# Altium PCB Karsyhev.PcbDoc
Units mm, origin at the board's own origin, x right, y up, seen from the top; angles counter-clockwise.
Board outline 32 x 34 mm, 2 copper layers (Top Layer, Bottom Layer); 35 components, 21 nets, 187 pads, 53 vias.
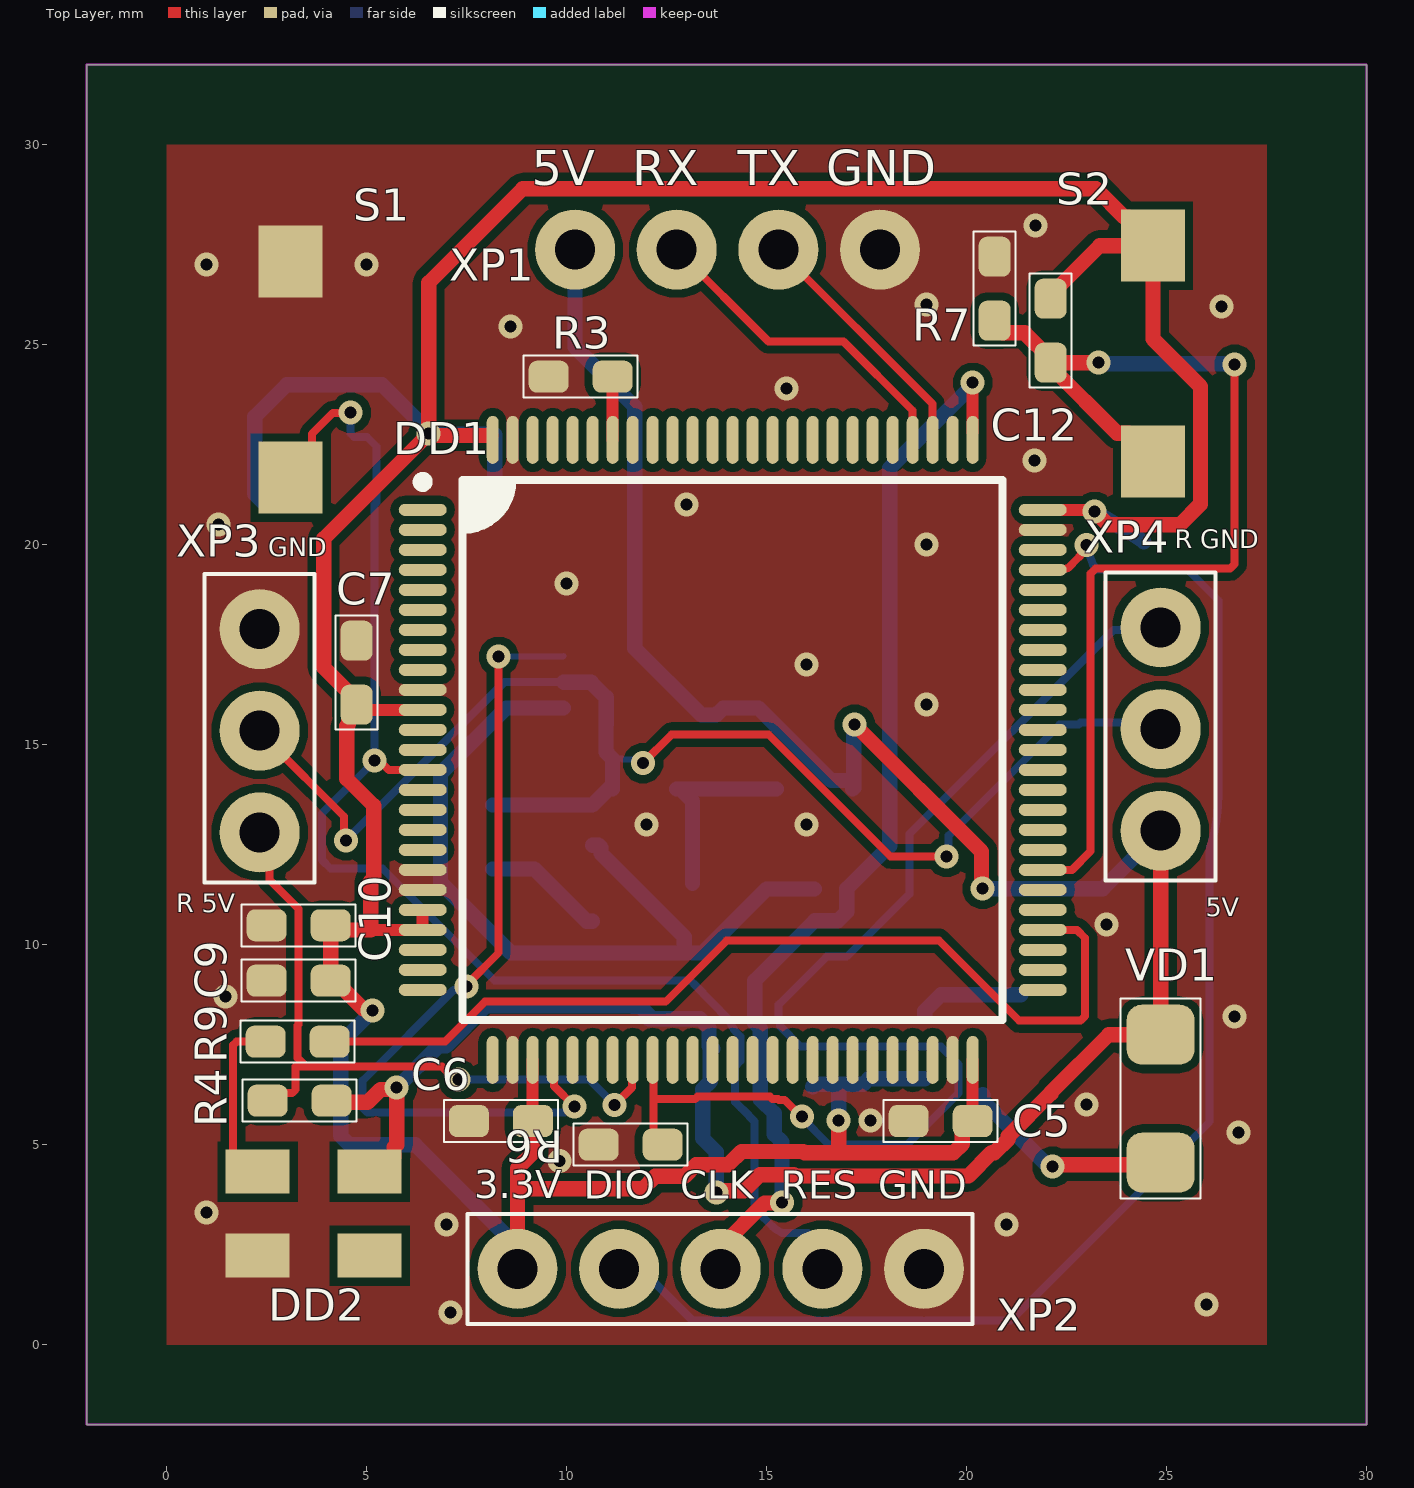
[diagram p0: Top Layer view]
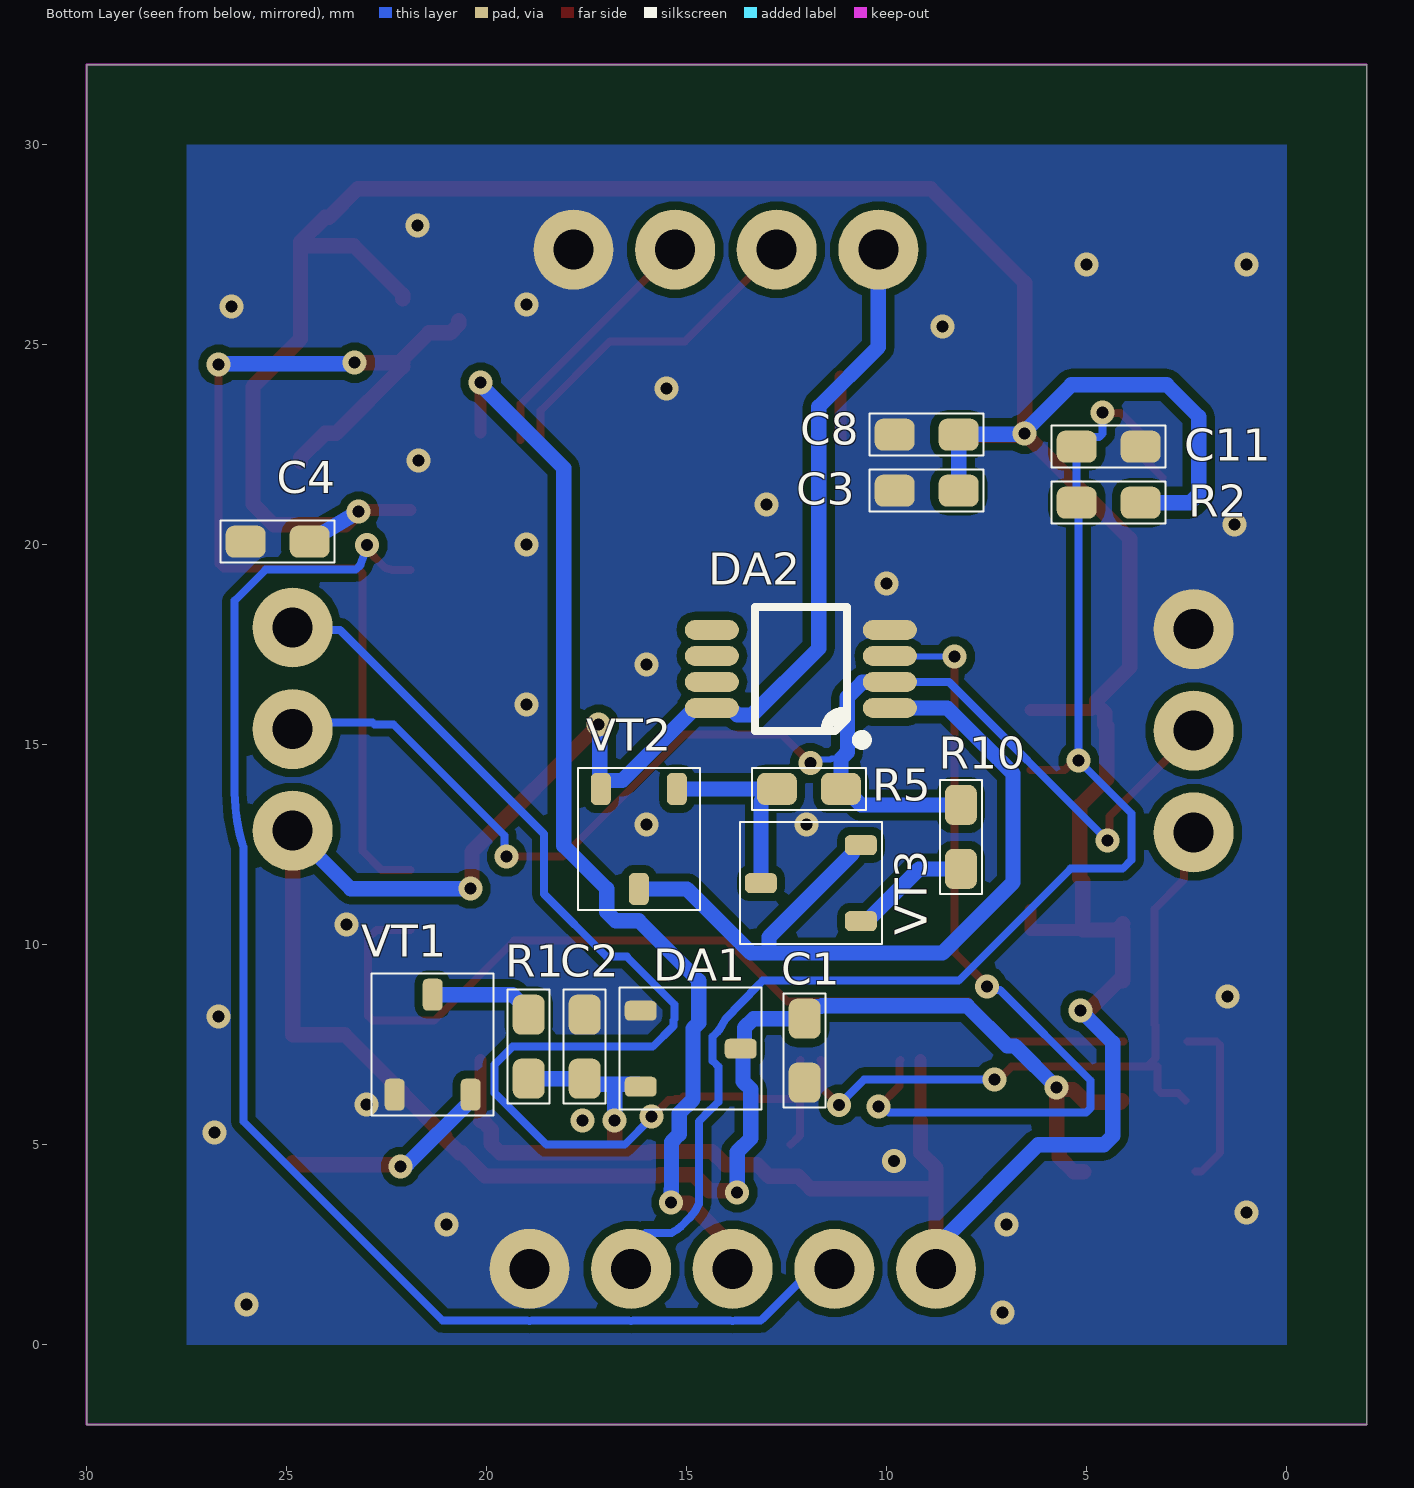
[diagram p1: Bottom Layer view, seen from below]
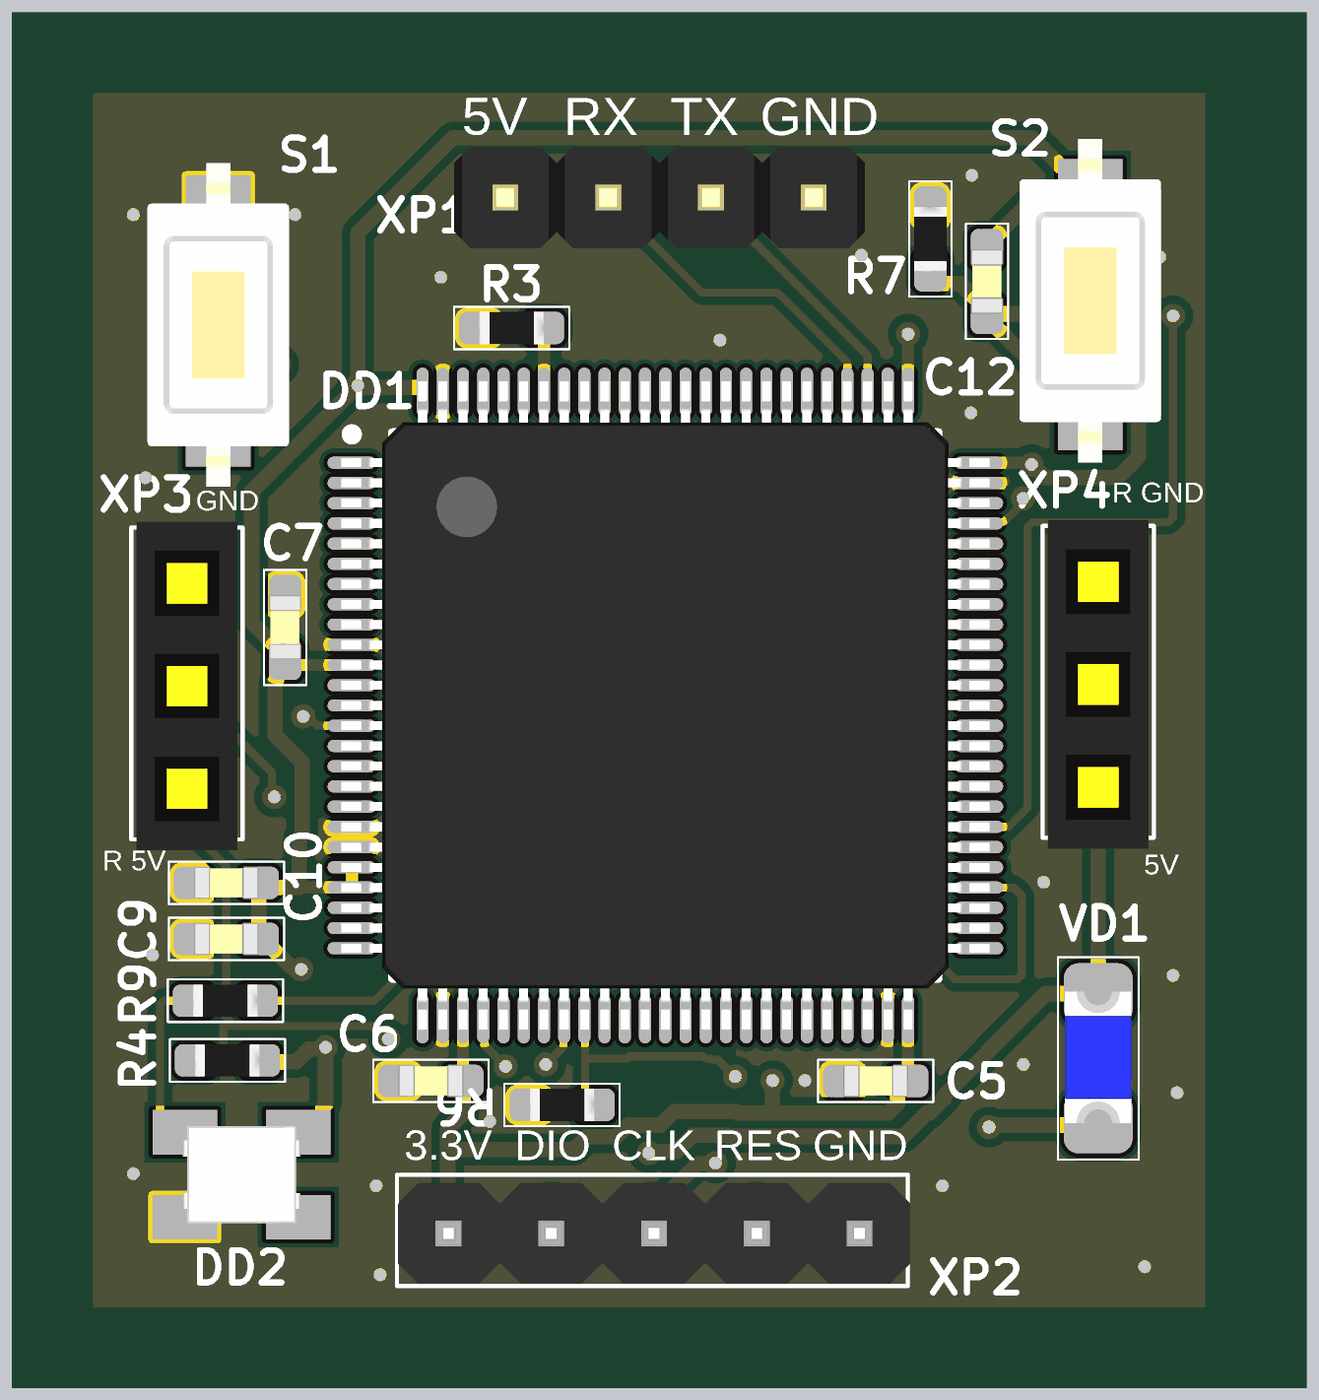
[diagram p2: 3D render of the assembled board from above, using the file's embedded part models]
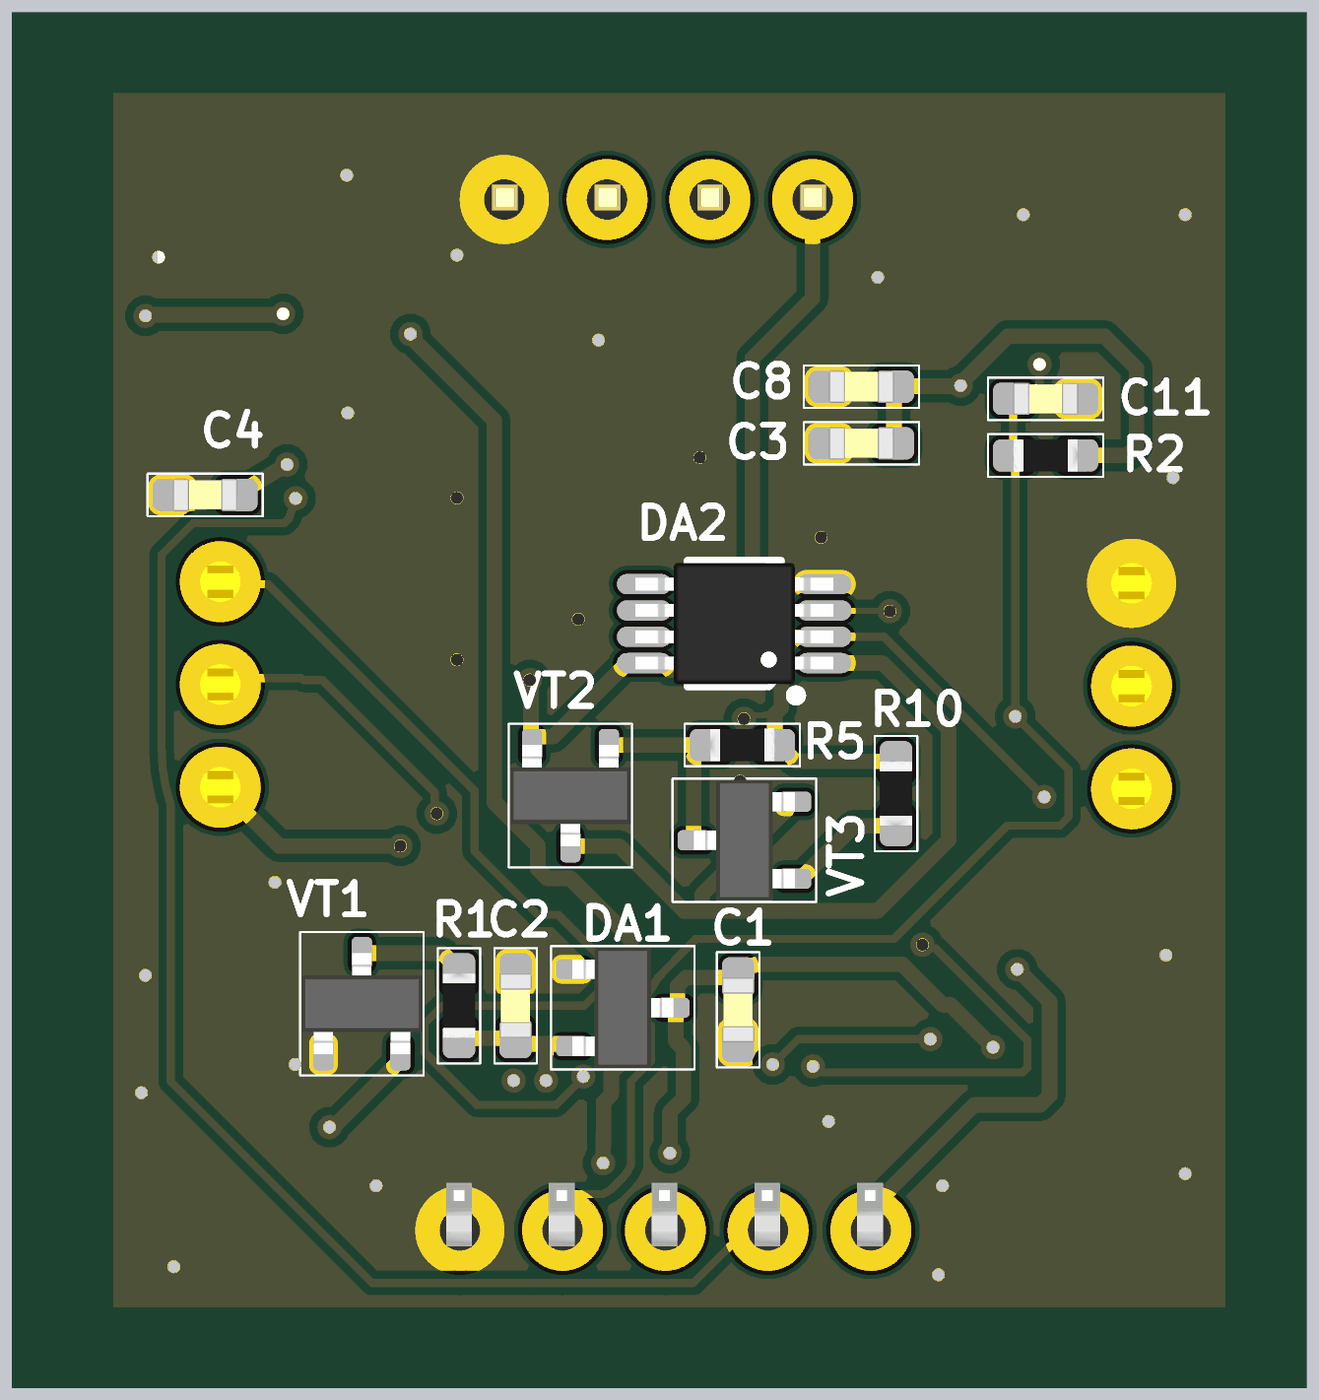
[diagram p3: 3D render of the assembled board from below, using the file's embedded part models]

## Layer stack, top to bottom
Top Solder: solder mask 0.0102, Solder Resist, Dk 3.5
Top Layer: signal copper 0.0356
Dielectric 1: dielectric 0.32, FR-4, Dk 4.8
Bottom Layer: signal copper 0.0356
Bottom Solder: solder mask 0.0102, Solder Resist, Dk 3.5

## Board outline
-2,-2 30,-2 30,32 -2,32

## Design rules (kind name [scope] priority, off if disabled: settings)
Clearance [All] p1: gap=0.2 ignorepadtopadclearanceinfootprint=TRUE
PlaneConnect [All] p1: planeconnectstyle=Direct reliefexpansion=0.508 reliefentries=4 reliefconductorwidth=0.254 reliefairgap=0.254
PolygonConnect [All] p1: connectstyle=Direct reliefconductorwidth=0.254 reliefentries=2 polygonreliefangle="45 Angle" airgapwidth=0.254
RoutingVias [All] p1: holewidth=0.3 width=0.6 viastyle="Through Hole" minholewidth=0.3 minwidth=0.6 maxholewidth=0.3 maxwidth=0.6
SolderMaskExpansion [All] p1: expansion=0.102 istentingtop=FALSE
Width PWR_width [InNetClass('PWR')] p1: maxlimit=0.5 minlimit=0.2 preferedwidth=0.5
Width [All] p2: maxlimit=0.5 minlimit=0.2 preferedwidth=0.2
29 further rules are at their usual default settings.

## Components (designator, comment, footprint, x,y, rotation, side; value= is the part's Value field where it differs from the comment)
C1 "SetValue!" C_SMD_0603 12.05,6.55 r90 bottom
C2 "SetValue!" C_SMD_0603 17.55,8.25 r270 bottom
C3 "100n" C_SMD_0603 9.8,21.35 r180 bottom
C4 "100n" C_SMD_0603 26.025,20.075 r180 bottom
C5 "100n" C_SMD_0603 18.55,5.591 r0 top
C6 "100n" C_SMD_0603 7.556,5.591 r0 top
C7 "100n" C_SMD_0603 4.75,17.6 r270 top
C8 "4.7u" C_SMD_0603 9.8,22.75 r180 bottom
C9 "10n" C_SMD_0603 2.5,9.1 r0 top
C10 "1u" C_SMD_0603 2.5,10.486 r0 top
C11 "SetValue!" C_SMD_0603 3.65,22.45 r0 bottom
C12 "SetValue!" C_SMD_0603 22.1,24.55 r90 top
DA1 "STU_5.5-3.3_NCP114ASN330T1G_SMD_TSOP-5" SOT23-3 16.15,8.35 r180 bottom
DA2 "OA_MC1458_THT_DIP-8" SOP-8 12.146,16.894 r0 bottom
DD1 "STM32F103C8T6" "ST LQFP-100 14x14MM" 14.15,14.871 r0 top
DD2 "Обозначение при заказе" NeoPixel 3.675,3.275 r0 top
R1 "SetValue!" R_SMD_0603 18.95,6.65 r90 bottom
R2 "SetValue!" R_SMD_0603 5.25,21.05 r180 bottom
R3 "SetValue!" R_SMD_0603 9.55,24.2 r0 top
R4 "SetValue!" R_SMD_0603 2.525,6.1 r0 top
R5 "SetValue!" R_SMD_0603 11.146,13.894 r0 bottom
R6 "SetValue!" R_SMD_0603 10.8,5 r0 top
R7 "SetValue!" R_SMD_0603 20.7,25.6 r90 top
R9 "SetValue!" R_SMD_0603 2.475,7.575 r0 top
R10 "SetValue!" R_SMD_0603 8.146,13.494 r270 bottom
S1 "BUT_SMD_KLS7-TS3608-5.0-180" BUT_SMD 3.1,27.075 r270 top
S2 "BUT_SMD_KLS7-TS3608-5.0-180" BUT_SMD 24.654,22.075 r90 top
VD1 "LED_SMD_BLUE" LED_SMD_BLUE 24.85,7.75 r270 top
VT1 "Обозначение при заказе" SOT23-3 22.3,6.25 r90 bottom
VT2 "Обозначение при заказе" SOT23-3 15.246,13.894 r270 bottom
VT3 "Обозначение при заказе" SOT23-3 10.646,10.59 r0 bottom
XP1 "XS_4PINS_PINS_Left" UART 10.21,27.375 r0 top
XP2 "XS_5PINS_PINS_Left" ST-LINK 8.77,1.898 r0 top
XP3 "Обозначение при заказе" 3PINS -0.575,15.87 r90 top
XP4 "Обозначение при заказе" 3PINS 21.95,15.91 r90 top

## Footprints (in the part's own frame and the unit in brackets; to place one, negate y for a bottom-side part, rotate by r counter-clockwise, add the part's x,y. Pads: shape width x height; smd on the part's side, far side on the other; paste and mask are expansions set on the pad)
3PINS [mm]
  round 2 hole 1: 1(-3.06,-2.9) 2(-0.52,-2.9) 3(2.02,-2.9)
  silkscreen extent -4.31,-4.28 3.4,-1.52, body extent -4.58,-4.15 3.54,-1.65, height 5
BUT_SMD [mm]
  rect 1.8x1.6 smd: 1(0,0) 2(5.4,0)
  body extent -1.2,-1.75 6.8,1.75, height 2.5
C_SMD_0603 [mm]
  rrect50% 1x0.8 smd: 1(0,0) 2(1.6,0)
  silkscreen extent -0.63,-0.53 2.22,0.53, body extent 0,-0.4 1.6,0.4, height 0.8
LED_SMD_BLUE [mm]
  rrect50% 1.5x1.7 smd: 1(0,0) 2(3.2,0)
  silkscreen extent -0.9,-1 4.1,1, body extent -0.06,-0.82 3.21,0.82, height 0.9
NeoPixel [mm]
  rect 1.6x1.1 smd: 1(-1.4,-1.05) 2(-1.4,1.05) 3(1.4,1.05) 4(1.4,-1.05)
  body extent -1.45,-1.2 1.45,1.2, height 1.1
R_SMD_0603 [mm]
  rrect50% 1x0.8 smd: 1(0,0) 2(1.6,0)
  silkscreen extent -0.63,-0.53 2.22,0.53, body extent 0,-0.4 1.6,0.4, height 0.45
SOP-8 [mm] "TSOP, 8-Leads, Body 3.00x3.00mm, Pitch 0.65mm, IPC Medium Density"
  oval 1.35x0.5 smd: 1(-2.225,0.975) 2(-2.225,0.325) 3(-2.225,-0.325) 4(-2.225,-0.975) 5(2.225,-0.975) 6(2.225,-0.325) 7(2.225,0.325) 8(2.225,0.975)
  silkscreen extent -1.65,-1.55 1.15,1.9, body extent -2.45,-1.5 2.45,1.5, height 1.1
SOT23-3 [mm]
  rrect50% 0.8x0.5 smd: 1(0,0) 2(0,-1.9) 3(2.5,-0.95)
  silkscreen extent -0.53,-2.47 3.03,0.58, body extent 0,-2.45 2.5,0.55, height 1.1
"ST LQFP-100 14x14MM" [mm] "Thin QFP, 100-Leads, Body 14x14mm, Pitch 0.5mm, ST Recommended"
  oval 1.2x0.3 smd: 1(-7.75,6) 2(-7.75,5.5) 3(-7.75,5) 4(-7.75,4.5) 5(-7.75,4) 6(-7.75,3.5) 7(-7.75,3) 8(-7.75,2.5) 9(-7.75,2) 10(-7.75,1.5) 11(-7.75,1) 12(-7.75,0.5) 13(-7.75,0) 14(-7.75,-0.5) 15(-7.75,-1) 16(-7.75,-1.5) 17(-7.75,-2) 18(-7.75,-2.5) 19(-7.75,-3) 20(-7.75,-3.5) 21(-7.75,-4) 22(-7.75,-4.5) 23(-7.75,-5) 24(-7.75,-5.5) 25(-7.75,-6) 51(7.75,-6) 52(7.75,-5.5) 53(7.75,-5) 54(7.75,-4.5) 55(7.75,-4) 56(7.75,-3.5) 57(7.75,-3) 58(7.75,-2.5) 59(7.75,-2) 60(7.75,-1.5) 61(7.75,-1) 62(7.75,-0.5) 63(7.75,0) 64(7.75,0.5) 65(7.75,1) 66(7.75,1.5) 67(7.75,2) 68(7.75,2.5) 69(7.75,3) 70(7.75,3.5) 71(7.75,4) 72(7.75,4.5) 73(7.75,5) 74(7.75,5.5) 75(7.75,6)
  oval 0.3x1.2 smd: 26(-6,-7.75) 27(-5.5,-7.75) 28(-5,-7.75) 29(-4.5,-7.75) 30(-4,-7.75) 31(-3.5,-7.75) 32(-3,-7.75) 33(-2.5,-7.75) 34(-2,-7.75) 35(-1.5,-7.75) 36(-1,-7.75) 37(-0.5,-7.75) 38(0,-7.75) 39(0.5,-7.75) 40(1,-7.75) 41(1.5,-7.75) 42(2,-7.75) 43(2.5,-7.75) 44(3,-7.75) 45(3.5,-7.75) 46(4,-7.75) 47(4.5,-7.75) 48(5,-7.75) 49(5.5,-7.75) 50(6,-7.75) 76(6,7.75) 77(5.5,7.75) 78(5,7.75) 79(4.5,7.75) 80(4,7.75) 81(3.5,7.75) 82(3,7.75) 83(2.5,7.75) 84(2,7.75) 85(1.5,7.75) 86(1,7.75) 87(0.5,7.75) 88(0,7.75) 89(-0.5,7.75) 90(-1,7.75) 91(-1.5,7.75) 92(-2,7.75) 93(-2.5,7.75) 94(-3,7.75) 95(-3.5,7.75) 96(-4,7.75) 97(-4.5,7.75) 98(-5,7.75) 99(-5.5,7.75) 100(-6,7.75)
  silkscreen extent -7.87,-6.75 6.75,6.82, body extent -8.01,-8.01 8.01,8.01, height 1.63
ST-LINK [mm]
  round 2 hole 1: 1(0,0) 2(2.54,0) 3(5.08,0) 4(7.62,0) 5(10.16,0)
  silkscreen extent -1.25,-1.38 11.37,1.38, body extent -1.23,-1.33 11.43,1.17, height 8.61
UART [mm]
  round 2 hole 1: 1(0,0) 2(2.54,0) 3(5.08,0) 4(7.62,0)
  body extent -1.28,-1.2 8.88,1.3, height 10.54

## Part data
C1 C2 C3 C4 C5 C6 C7 C8 C9 C10 C11 C12: library part C_Ceramic_SMD_0603
DD1: library part STM32_F103c8t6_LQFP48
DD2: library part NeoPixel, "Описание свойств компонента"
R1 R2 R3 R4 R5 R6 R7 R9 R10: library part R_SMD_0603
VT1 VT2 VT3: library part npn
XP3 XP4: library part XS_3pins, "Описание свойств компонента"

## Via types
v1: diameter 0.6, hole 0.3, Top Layer to Bottom Layer, tented both sides, 53 vias

## Nets (pads, with @x,y where several pads share a name; then routed paths per layer and width w, separated by ;. In a path a pad name is that pad's centre, name@x,y a point inside that pad or via, vN(x,y) a via of type N, cw(c..) or ccw(c..) an arc to the next point about the centre after c; other vN are vias at no path point)
3.3V: C2.2 C3.2 C4.2 C5.2 C6.2 C7.2 C8.2 C9.2 C10.2 C12.2 DA1.2 DD1.11 DD1.21 DD1.22 DD1.28 DD1.50 DD1.75 DD1.100 R1.1 R2.2 S2.2 XP2.1 | length 106.2
  Top Layer w0.3: C7.2 4.879,15.871 DD1.11 ; 5.1,10.371 DD1.22 DD1.21 ; C6.2@9.15,5.75 DD1.28 ; C5.2@20.15,5.75 DD1.50 ; DD1.75 23.154,20.871 v1(23.2,20.825)
  Top Layer w0.381: C10.2@4.1,10.371 C9.2 4.205,9.1 4.913,8.392 5.108,8.392 v1(5.15,8.35) ; C10.2@4.1,10.525 4.254,10.371 5.1,10.371 5.1,11.596 5.175,11.671 5.175,13.475 4.5,14.15 4.5,15.467 4.546,15.514 4.546,15.796 C7.2 4.75,16.105 3.925,16.93 3.925,20.15 v1(6.55,22.775) ; DD1.100@8.11,22.733 6.592,22.733 v1(6.55,22.775) ; XP2.1@8.77,2.444 8.77,3.9 8.77,4.414 9.156,4.8 C6.2 ; 8.77,4.03 8.9,3.9 11.9,3.9 12.209,4.209 12.945,4.209 13.235,4.5 14.035,4.5 14.367,4.832 15.914,4.832 15.946,4.8 16.8,4.8 ; v1(16.8,5.6) 16.8,4.8 ; C5.2 20.098,5.591 19.889,5.383 19.889,5.023 19.666,4.8 16.8,4.8 ; C12.2 22.1,26.25 23.325,27.475 S2.2 ; v1(23.2,20.825) 23.208,20.825 23.533,20.5 25.332,20.5 25.845,21.013 25.845,23.955 24.654,25.146 S2.2 ; v1(6.55,22.775) 6.55,26.55 8.9,28.9 23.229,28.9 23.945,28.185 24.045,28.185 24.654,27.575 S2.2
  Bottom Layer w0.381: R2.2 2.423,21.05 2.2,21.273 2.2,23.2 3,24 5.384,24 6.55,22.834 v1(6.55,22.775) 6.562,22.762 8.188,22.762 C8.2 C3.2 ; v1(5.15,8.35) 4.35,7.55 4.35,5.223 4.573,5 6.214,5 XP2.1@8.77,2.444 ; DA1.2 16.21,6.509 16.81,6.509 ; v1@16.842,5.642 v1(16.8,5.6) 16.8,6.5 16.81,6.509 ; R1.1 C2.2 17.41,6.509 16.81,6.509 ; v1(23.2,20.825) 24.125,20.275 C4.2
5V: C1.2 DA1.3 DA2.8 DD2.3 R4.2 VD1.1 VT2.2 XP1.1 XP4.1 | length 65.3
  Top Layer w0.381: R4.2 4.164,6.061 5.022,6.061 5.345,6.383 5.708,6.383 v1(5.75,6.425) ; DD2.3 5.325,4.325 5.684,4.685 5.684,4.935 5.75,5 v1@5.75,6.35 ; v1(13.738,3.81) 13.78,3.851 14.436,3.851 14.835,4.251 15.674,4.251 15.705,4.219 20.042,4.219 20.624,4.801 20.695,4.801 21.041,5.147 21.041,5.218 22.112,6.289 22.112,6.312 23.55,7.75 VD1.1 XP4.1 ; v1(17.2,15.5) 20.369,12.331 20.369,11.431 v1(20.4,11.4)
  Bottom Layer w0.381: v1(5.75,6.425) 6.796,7.471 6.984,7.471 7.988,8.475 11.617,8.475 11.639,8.454 11.841,8.454 12.05,8.245 C1.2 13.331,8.15 13.554,7.927 13.554,7.459 DA1.3@13.613,7.4 ; XP1.1 10.21,24.94 11.7,23.45 11.7,17.408 13.368,15.74 13.735,15.74 13.914,15.919 14.796,15.919 16.612,14.103 17.087,14.103 17.146,14.044 VT2.2 17.173,13.921 17.173,15.473 v1(17.2,15.5) ; DA1.3 13.591,7.341 13.591,6.578 13.4,6.388 13.4,5.159 13.738,4.821 v1(13.738,3.81) ; v1(20.4,11.4) 23.4,11.4 XP4.1
Base: DA2.2 R5.1 R10.1 XP3.2 XP4.2 | length 34.5
  Top Layer w0.2: XP3.2@2.521,15.394 2.521,15.117 4.428,13.21 4.428,12.666 v1(4.485,12.61) ; v1(11.907,14.541) 12.617,15.25 15.05,15.25 18.1,12.2 v1(19.5,12.2)
  Bottom Layer w0.15: 11.146,14.65 11.376,14.65 11.399,14.627 11.821,14.627 v1(11.907,14.541)
  Bottom Layer w0.2: v1(4.485,12.61) 8.444,16.569 DA2.2 ; v1(19.5,12.2) 19.55,12.25 19.55,12.725 22.325,15.5 22.8,15.5 22.85,15.55 24.69,15.55 XP4.2
  Bottom Layer w0.381: R10.1 10.641,13.494 11.041,13.894 R5.1 11.146,14.65 10.984,14.813 10.984,15.497 10.987,15.5 10.987,16.184 10.611,16.559 9.931,16.559 DA2.2
GND: C1.1 C2.1 C3.1 C4.1 C5.1 C6.1 C7.1 C8.1 C9.1 C10.1 C11.1 DA1.1 DA2.4 DD1.10 DD1.19 DD1.20 DD1.27 DD1.49 DD1.74 DD1.99 DD2.1 R3.1 R6.1 R7.2 S1.1 VT1.1 XP1.4 XP2.5 XP3.3
  other v1: 7.1,0.8 26,1 7,3 21,3 1,3.3 9.814,4.59 26.8,5.3 17.6,5.6 23,6 26.7,8.2 1.475,8.7 23.5,10.5 12,13 16,13 19,16 16,17 10,19.025 19,20 1.3,20.5 13,21 21.7,22.1 15.5,23.9 8.6,25.45 26.375,25.95 19,26 1,27 5,27 21.725,27.975
NetC11_2: C11.2 DD1.14 R2.1 S1.2 XP2.4 | length 35
  Top Layer w0.2: S1.2 3.627,22.202 3.627,22.771 4.154,23.298 4.598,23.298 v1(4.6,23.3) ; v1(5.2,14.6) 5.322,14.6 5.551,14.371 DD1.14
  Bottom Layer w0.2: v1(4.6,23.3) 4.6,22.777 4.688,22.689 5.011,22.689 C11.2 R2.1 5.2,21 v1(5.2,14.6) 3.885,13.285 3.885,12.115 4.1,11.9 5.4,11.9 8.2,9.1 13.1,9.1 13.217,8.983 14.034,8.141 14.197,7.864 14.228,7.823 14.35,7.701 14.35,7.099 14.21,6.958 14.21,6.073 14.359,5.923 14.417,5.865 14.698,5.584 14.698,3.517 14.775,3.369 14.788,3.344 14.927,3.173 14.94,3.159 15.139,2.96 15.22,2.891 15.386,2.798 16.036,2.798 XP2.4@16.39,2.444
NetC12_1: C12.1 DD1.57 R7.1 S2.1 | length 27.3
  Top Layer w0.15: C12.1@22.1,24.45 C12.1
  Top Layer w0.2: DD1.57 22.629,11.871 23.1,12.342 23.1,19.283 23.217,19.4 26.583,19.4 26.7,19.517 v1(26.7,24.5)
  Top Layer w0.381: R7.1 20.7,25.505 20.909,25.296 21.448,25.296 22.1,24.645 C12.1 v1(23.3,24.55) ; C12.1@22.1,24.45 23.765,22.785 24.045,22.785 24.654,22.175 S2.1
  Bottom Layer w0.381: v1(23.3,24.55) 23.325,24.525 26.675,24.525 v1(26.7,24.5)
NetDA2_1: DA2.1 VT2.3 VT3.2 | length 21
  Bottom Layer w0.381: DA2.1 8.488,15.919 6.846,14.277 6.846,11.554 8.606,9.794 12.855,9.794 ; VT3.2 10.796,12.49 10.856,12.43 10.856,12.28 12.94,10.195 12.94,9.88 12.855,9.794 ; VT2.3 14.994,11.394 13.394,9.794 12.855,9.794
NetDA2_3: DA2.3 DD1.29 | length 21.3
  Top Layer w0.2: v1(7.494,8.957) 7.494,8.994 8.3,9.8 v1(8.3,17.2) ; DD1.29 9.679,7.092 9.679,6.471 v1(10.2,5.95)
  Bottom Layer w0.15: v1(8.3,17.2) 8.309,17.209 9.912,17.209 DA2.3
  Bottom Layer w0.2: v1(7.494,8.957) 7.408,8.871 7.171,8.871 4.9,6.6 4.9,5.917 5.017,5.8 9.942,5.8 10.092,5.95 v1(10.2,5.95)
NetDD1_33: DD1.33 R4.1 XP3.1 | length 17.4
  Top Layer w0.2: XP3.1@2.521,12.854 2.566,12.809 2.566,11.627 3.3,10.893 3.3,8.007 3.275,7.982 3.275,7.168 3.493,6.95 ; R4.1 2.714,6.289 3.137,6.289 3.225,6.377 3.225,6.95 3.5,6.95 6.883,6.95 7.208,6.625 v1(7.3,6.625) ; v1(11.197,5.999) 11.631,6.433 11.631,7.102 DD1.33
  Bottom Layer w0.2: v1(7.3,6.625) 10.57,6.625 v1(11.197,5.999)
NetDD1_34: DD1.34 R6.2 XP4.3 | length 31.4
  Top Layer w0.2: DD1.34 12.169,7.102 12.169,6.581 12.171,6.579 12.171,6.14 ; R6.2 12.171,5.229 12.171,6.14 ; v1(15.879,5.7) 15.868,5.7 15.449,6.119 15.308,6.119 15.282,6.145 15.14,6.145 15.085,6.2 13.264,6.2 13.203,6.14 12.171,6.14
  Bottom Layer w0.2: v1(15.879,5.7) 15.879,5.672 16.551,5 18.507,5 19.8,6.293 19.8,7.007 19.357,7.45 15.85,7.45 15.331,7.969 15.331,8.107 15.3,8.138 15.3,8.501 16.499,9.7 17,9.7 18.566,11.265 18.566,12.765 23.667,17.867 24.787,17.867 XP4.3
NetDD1_54: DD1.54 R9.2 | length 23.9
  Top Layer w0.2: R9.2 6.96,7.575 7.96,8.575 12.475,8.575 14,10.1 19.313,10.1 21.313,8.1 22.846,8.1 22.963,8.217 22.963,10.162 22.754,10.371 DD1.54
NetDD1_72: DD1.72 XP2.2 | length 36.1
  Top Layer w0.2: DD1.72 22.35,19.371 22.536,19.421 22.8,19.684 22.998,19.923 22.989,19.931 v1(22.989,19.99)
  Bottom Layer w0.2: XP2.2@11.31,2.444 13.096,0.659 13.154,0.6 13.785,0.6 ccw(c13.85,1.898) 13.915,0.6 16.325,0.6 ccw(c16.39,1.898) 16.455,0.6 18.865,0.6 ccw(c18.93,1.898) 18.995,0.6 21.1,0.6 26.075,5.575 26.075,12.382 26.086,12.446 ccw(c21.98,13.79) 26.3,13.79 26.3,18.6 25.525,19.375 23.44,19.375 23.275,19.375 23.158,19.492 22.998,19.923 22.989,19.931 v1(22.989,19.99)
NetDD1_76: DD1.76 XP2.3 | length 26.6
  Top Layer w0.3: DD1.76@20.15,22.8 v1(20.15,24.05)
  Top Layer w0.381: XP2.3@13.85,2.444 14.948,3.542 15.369,3.542 v1(15.388,3.56)
  Bottom Layer w0.381: v1(15.388,3.56) 15.38,4.306 15.38,4.622 15.38,5.07 15.189,5.262 15.189,5.787 14.841,6.135 14.841,7.904 14.7,8.045 14.7,9.1 16.2,10.6 16.777,10.6 17,10.823 17,11.4 18.075,12.475 18.075,21.916 20.15,23.991 v1(20.15,24.05)
NetDD1_94: DD1.94 R3.2 | length 1.6
  Top Layer w0.3: DD1.94 R3.2
NetDD2_2: DD2.2 R9.1 | length 4.3
  Top Layer w0.2: DD2.2 2.137,4.325 1.662,4.8 1.662,7.487 1.75,7.575 R9.1
NetR1_2: R1.2 VT1.3 | length 2.7
  Bottom Layer w0.381: R1.2 18.95,8.345 19.355,8.75 VT1.3
NetR5_2: R5.2 VT2.1 VT3.3 | length 5
  Bottom Layer w0.381: R5.2 R5.2@12.841,13.894 ; VT3.3 13.146,13.589 R5.2@12.841,13.894 ; VT2.1 R5.2@12.841,13.894
NetR10_2: R10.2 VT3.1 | length 3
  Bottom Layer w0.381: R10.2 9.192,11.894 10.496,10.59 VT3.1
NetVD1_2: VD1.2 VT1.2 | length 5.3
  Top Layer w0.381: v1(22.15,4.45) 22.2,4.5 24.8,4.5 VD1.2
  Bottom Layer w0.381: VT1.2 20.4,6.1 21.987,4.513 22.087,4.513 v1(22.15,4.45)
RX: DD1.79 XP1.2 | length 8.3
  Top Layer w0.2: XP1.2 15.047,25.078 16.922,25.078 18.65,23.35 DD1.79
TX: DD1.78 XP1.3 | length 6.4
  Top Layer w0.2: XP1.3 19.15,23.515 DD1.78
pads on no net: DA2.5 DA2.6 DA2.7 DD1.1 DD1.2 DD1.3 DD1.4 DD1.5 DD1.6 DD1.7 DD1.8 DD1.9 DD1.12 DD1.13 DD1.15 DD1.16 DD1.17 DD1.18 DD1.23 DD1.24 DD1.25 DD1.26 DD1.30 DD1.31 DD1.32 DD1.35 DD1.36 DD1.37 DD1.38 DD1.39 DD1.40 DD1.41 DD1.42 DD1.43 DD1.44 DD1.45 DD1.46 DD1.47 DD1.48 DD1.51 DD1.52 DD1.53 DD1.55 DD1.56 DD1.58 DD1.59 DD1.60 DD1.61 DD1.62 DD1.63 DD1.64 DD1.65 DD1.66 DD1.67 DD1.68 DD1.69 DD1.70 DD1.71 DD1.73 DD1.77 DD1.80 DD1.81 DD1.82 DD1.83 DD1.84 DD1.85 DD1.86 DD1.87 DD1.88 DD1.89 DD1.90 DD1.91 DD1.92 DD1.93 DD1.95 DD1.96 DD1.97 DD1.98 DD2.4

## Polygon pours and split planes (outlines as drawn)
GND on Bottom Layer "GND_L02_P000" (solid, remove dead copper, pour order 0): 0,0 0,30 27.5,30 27.5,0
GND on Top Layer "GND_L01_P001" (solid, remove dead copper, pour order 1): 0,0 0,30 27.5,30 27.5,0

## Keep-outs
Top Layer:
  lines w0.05: -2,-2 -2,32
Keep-Out Layer:
  lines w0.05: -2,-2 30,-2 30,32 -2,32

## Silkscreen, mask and mechanical layers (free items; w line width, h text height)
Top Overlay:
  text "R GND" at 25.196,19.744 h0.8
  text "GND" at 2.544,19.544 h0.8
  text "R 5V" at 0.236,10.649 h0.8
  text "5V" at 25.981,10.549 h0.8

## Text inside footprints (layer, text, board x,y; h text height)
XP1: Top Overlay "GND" at 16.491,28.695 h1.5; Top Overlay "TX" at 14.274,28.695 h1.5; Top Overlay "RX" at 11.636,28.695 h1.5; Top Overlay "5V" at 9.123,28.703 h1.5
XP2: Top Overlay "GND" at 17.794,3.414 h1.2; Top Overlay "RES" at 15.357,3.414 h1.2; Top Overlay "3.3V" at 7.693,3.419 h1.2; Top Overlay "CLK" at 12.834,3.414 h1.2; Top Overlay "DIO" at 10.421,3.414 h1.2